# EAGLE board pi-shield (EAGLE 8.2.2)
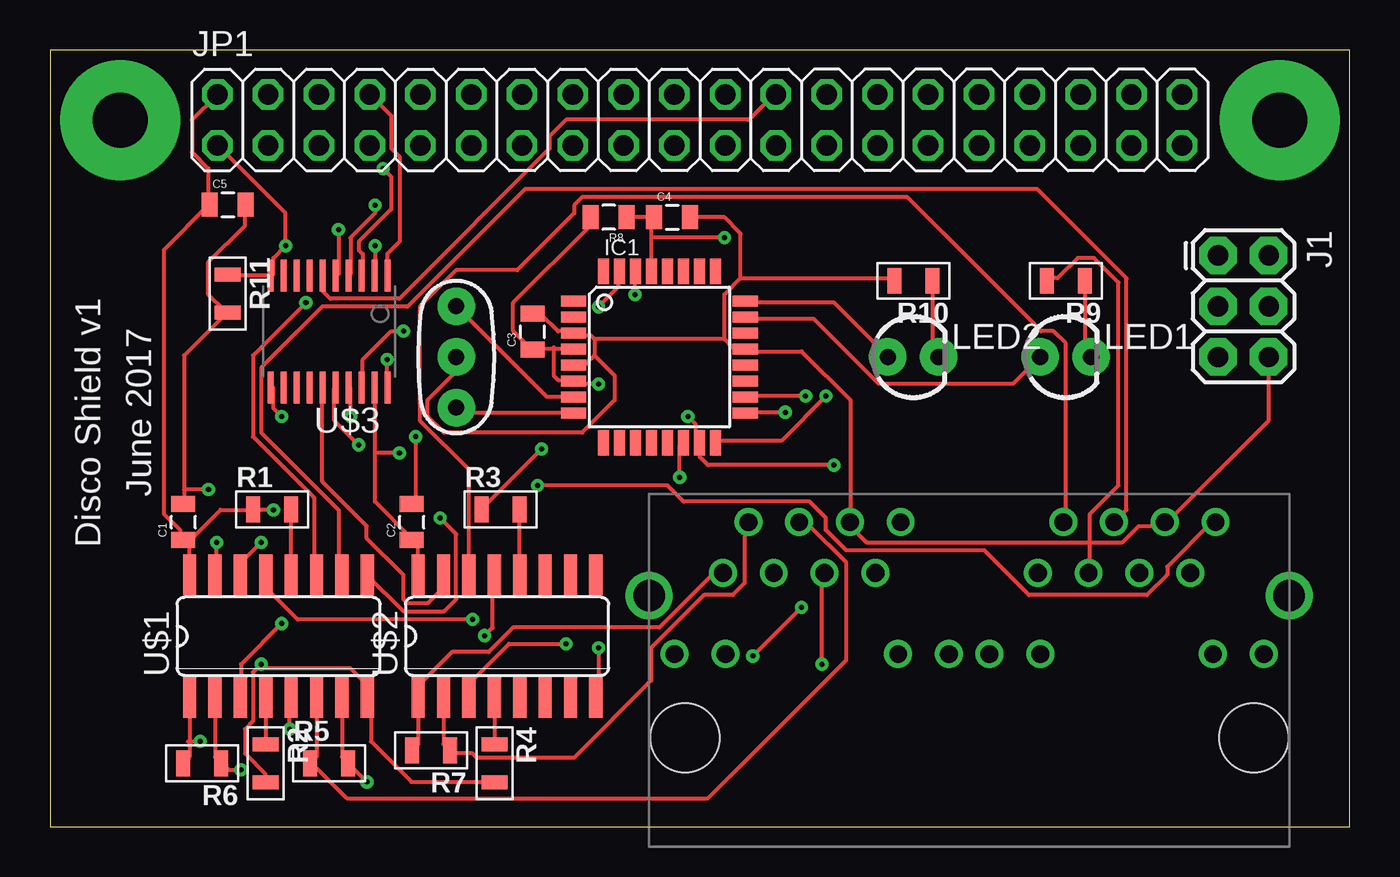
[diagram p0: board, top side]
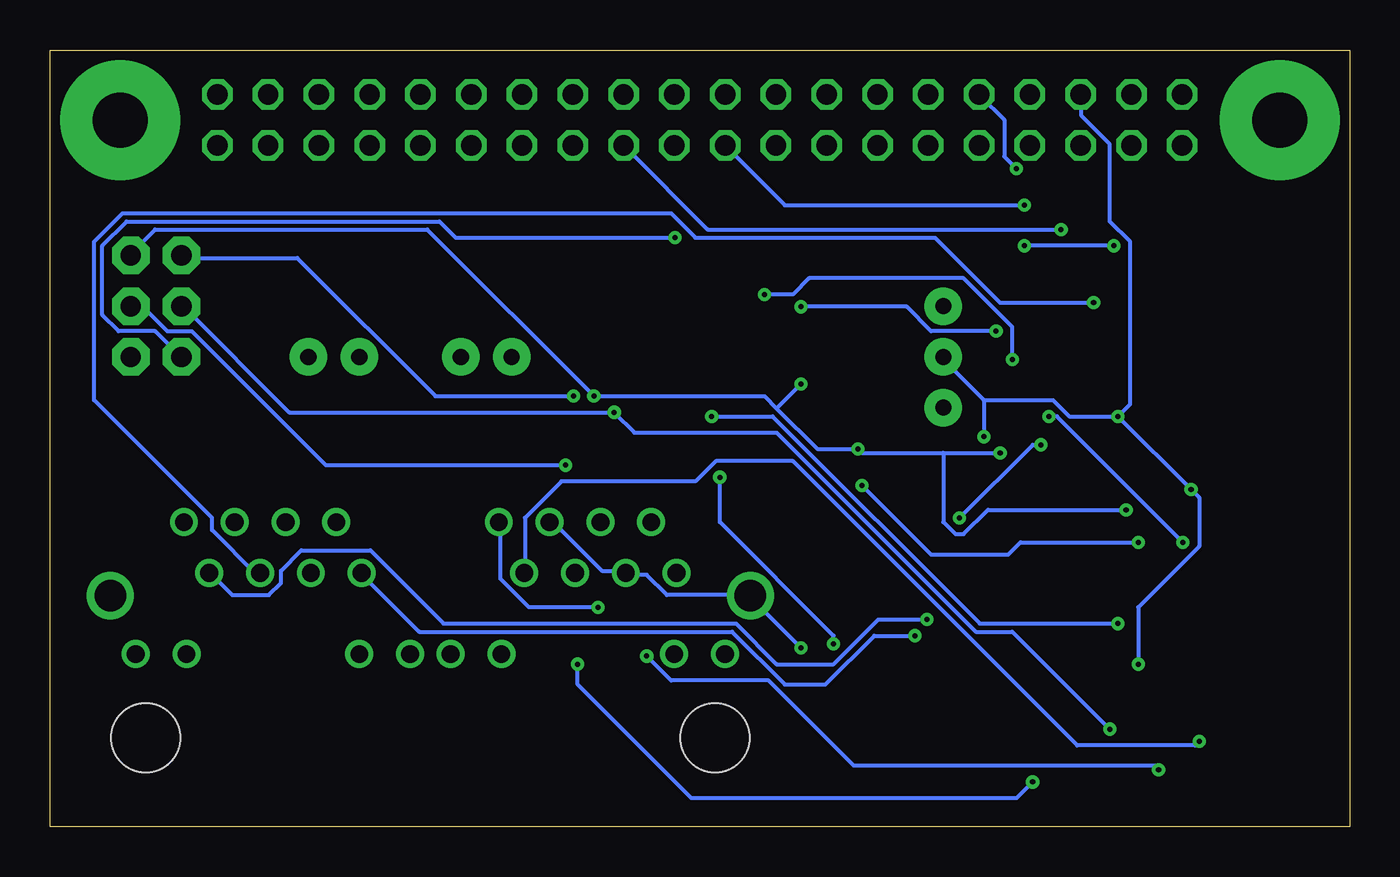
[diagram p1: board, bottom side, seen from below]

Size 65 x 38.85 mm. Coordinates in mm from the lower left corner, seen from the top.
Outline: 0,0 65,0 65,38.85 0,38.85 0,0
Copper layers (1*16): Top 0.035mm / dielectric 1.5mm / Bottom 0.035mm
Design rules "default *": minimum track width 8mil, minimum drill 10mil, track to track 8mil, track to pad 8mil, pad to pad 8mil, via to via 8mil, smd to smd 8mil, copper to edge 40mil, drill to drill 8mil, minimum pad ring 10mil, minimum via ring 8mil, stop-mask expansion 4mil, vias tented up to drill 0mil, thermal gap 10mil

## Footprints (pad centres in the part's own frame; a part is rotated, then mirrored left to right if it is on the bottom)
0805 = smd 0.8 x 1.2: 1 -0.9,0; 2 0.9,0
TQFP32-08 = smd 1.27 x 0.559: 1 -4.293,2.8; 2 -4.293,2; 3 -4.293,1.2; 4 -4.293,0.4; 5 -4.293,-0.4; 6 -4.293,-1.2; 7 -4.293,-2; 8 -4.293,-2.8; 17 4.293,-2.8; 18 4.293,-2; 19 4.293,-1.2; 20 4.293,-0.4; 21 4.293,0.4; 22 4.293,1.2; 23 4.293,2; 24 4.293,2.8 | smd 0.559 x 1.27: 9 -2.8,-4.293; 10 -2,-4.293; 11 -1.2,-4.293; 12 -0.4,-4.293; 13 0.4,-4.293; 14 1.2,-4.293; 15 2,-4.293; 16 2.8,-4.293; 25 2.8,4.293; 26 2,4.293; 27 1.2,4.293; 28 0.4,4.293; 29 -0.4,4.293; 30 -1.2,4.293; 31 -2,4.293; 32 -2.8,4.293
2X3 = drill 1.016 pad 1.88 octagon: 1 0,0; 2 0,2.54; 3 2.54,0; 4 2.54,2.54; 5 5.08,0; 6 5.08,2.54
2X20 = drill 1.016 octagon: 1 -24.13,-1.27; 2 -24.13,1.27; 3 -21.59,-1.27; 4 -21.59,1.27; 5 -19.05,-1.27; 6 -19.05,1.27; 7 -16.51,-1.27; 8 -16.51,1.27; 9 -13.97,-1.27; 10 -13.97,1.27; 11 -11.43,-1.27; 12 -11.43,1.27; 13 -8.89,-1.27; 14 -8.89,1.27; 15 -6.35,-1.27; 16 -6.35,1.27; 17 -3.81,-1.27; 18 -3.81,1.27; 19 -1.27,-1.27; 20 -1.27,1.27; 21 1.27,-1.27; 22 1.27,1.27; 23 3.81,-1.27; 24 3.81,1.27; 25 6.35,-1.27; 26 6.35,1.27; 27 8.89,-1.27; 28 8.89,1.27; 29 11.43,-1.27; 30 11.43,1.27; 31 13.97,-1.27; 32 13.97,1.27; 33 16.51,-1.27; 34 16.51,1.27; 35 19.05,-1.27; 36 19.05,1.27; 37 21.59,-1.27; 38 21.59,1.27; 39 24.13,-1.27; 40 24.13,1.27
LED3MM = drill 0.813 pad 1.88: A -1.27,0; K 1.27,0
R0805 = smd 0.7 x 1.3: P$1 -0.95,0; P$2 0.95,0
SOP-16 = smd 0.66 x 2.032: 1 -4.445,-3.073; 2 -3.175,-3.073; 3 -1.905,-3.073; 4 -0.635,-3.073; 5 0.635,-3.073; 6 1.905,-3.073; 7 3.175,-3.073; 8 4.445,-3.073; 9 4.445,3.073; 10 3.175,3.073; 11 1.905,3.073; 12 0.635,3.073; 13 -0.635,3.073; 14 -1.905,3.073; 15 -3.175,3.073; 16 -4.445,3.073
TSSOP20 = smd 0.3 x 1.6: P$1 -2.925,-2.8; P$2 -2.275,-2.8; P$3 -1.625,-2.8; P$4 -0.975,-2.8; P$5 -0.325,-2.8; P$6 0.325,-2.8; P$7 0.975,-2.8; P$8 1.625,-2.8; P$9 2.275,-2.8; P$10 2.925,-2.8; P$11 2.925,2.8; P$12 2.275,2.8; P$13 1.625,2.8; P$14 0.975,2.8; P$15 0.325,2.8; P$16 -0.325,2.8; P$17 -0.975,2.8; P$18 -1.625,2.8; P$19 -2.275,2.8; P$20 -2.925,2.8
RJSBE-5380-C2 = drill 0.89: 1@1 1.91,8.25; 1@2 17.66,8.25; 2@1 3.18,10.79; 2@2 18.93,10.79; 3@1 4.45,8.25; 3@2 20.2,8.25; 4@1 5.72,10.79; 4@2 21.47,10.79; 5@1 6.99,8.25; 5@2 22.74,8.25; 6@1 8.26,10.79; 6@2 24.01,10.79; 7@1 9.53,8.25; 7@2 25.28,8.25; 8@1 10.8,10.79; 8@2 26.55,10.79; 9@1 13.21,4.19; 9@2 28.96,4.19; 10@1 10.67,4.19; 10@2 26.42,4.19; 11@1 2.03,4.19; 11@2 17.78,4.19; 12@1 -0.51,4.19; 12@2 15.24,4.19 | drill 1.57: SHIELD@1 -1.78,7.11; SHIELD@2 30.23,7.11 | hole 3.45: 0,0; 28.45,0
RESONATOR-PTH = drill 0.8 pad 1.88: 1 -2.54,0; 2 0,0; 3 2.54,0

## Placement (x,y rotation side)
C1  .1u  [0805]  6.67,15.24 90 top
C2  .1u  [0805]  18.1,15.24 90 top
C3  .1u  [0805]  24.13,24.77 90 top
C4  .1u  [0805]  31.11,30.48 0 top
C5  10u  [0805]  8.89,31.11 0 top
IC1  MEGA48/88/168-AU  [TQFP32-08]  30.48,23.5 0 top
J1  AVR_SPI_PRG_6PTH  [2X3]  58.42,28.57 270 top
JP1  PI-HEADER  [2X20]  32.5,35.35 0 top
LED1  IND1  [LED3MM]  50.8,23.5 0 top
LED2  IND2  [LED3MM]  43.18,23.5 0 top
R1  1k  [R0805]  11.11,15.88 0 top
R2  1k  [R0805]  10.79,3.17 270 top
R3  1k  [R0805]  22.54,15.88 0 top
R4  1k  [R0805]  22.23,3.17 270 top
R5  100  [R0805]  13.97,3.17 0 top
R6  100  [R0805]  7.62,3.17 180 top
R7  100  [R0805]  19.05,3.81 180 top
R8  4K7  [0805]  27.94,30.48 180 top
R9  400  [R0805]  50.8,27.3 180 top
R10  400  [R0805]  43.18,27.3 180 top
R11  1k  [R0805]  8.89,26.67 270 top
U$1  SN65C1167  [SOP-16]  11.43,9.53 0 top
U$2  SN65C1167  [SOP-16]  22.86,9.53 0 top
U$3  TXB0108PWR  [TSSOP20]  13.97,24.77 180 top
U$4  RJSBE-5380-C2  [RJSBE-5380-C2]  31.75,4.45 0 top
Y1  RESONATORPTH  [RESONATOR-PTH]  20.32,23.5 270 top

## Library data of the parts
C1-C5 LED1 LED2 R8 Y1 = SparkFun
IC1 = avr-7
J1 = SparkFun-Connectors
JP1 = pinhead
R1-R7 R9-R11 = MF_Passives; POPULATE: 1
U$1-U$4 = GARTH

## Nets
!SS_AT: IC1.14 U$2.3
CE0_PI: JP1.24 U$3.P$6
CE0_PI_5V: U$2.15 U$3.P$15
CE1_PI: JP1.26
D4: U$2.9
D-B-1: U$1.10 U$4.4@2
D-B-2: U$1.11 U$4.5@2
D-BR-1: U$1.14 U$4.8@2
D-BR-2: U$1.13 U$4.7@2
D-O-1: U$2.14 U$4.2@2
D-O-2: U$2.13 U$4.1@2
GND: C1.2 C2.2 C3.2 C4.2 C5.2 IC1.3 IC1.5 IC1.21 J1.6 JP1.6 R2.P$2 R4.P$2 R9.P$2 R10.P$2 R11.P$2 U$1.8 U$2.8 U$3.P$11 U$4.3@1 U$4.3@2 U$4.6@1 U$4.6@2 U$4.SHIELD@1 Y1.2
LED1: IC1.23 LED1.A
LED2: IC1.24 LED2.A
MISO_AT: IC1.16 J1.1
MISO_PI: JP1.21
MOSI_AT: IC1.15 J1.4 U$1.3
MOSI_PI: JP1.19 U$3.P$4
MOSI_PI_5V: U$1.15 U$3.P$17
N$1: R1.P$2 U$1.12
N$3: R2.P$1 U$1.4
N$5: R3.P$2 U$2.12
N$6: R4.P$1 U$2.4
N$9: LED1.K R9.P$1
N$10: LED2.K R10.P$1
N$11: IC1.7 Y1.1
N$12: IC1.8 Y1.3
R4: U$2.5
R-B-1: R5.P$1 U$1.6 U$4.4@1
R-B-2: R5.P$2 U$1.7 U$4.5@1
R-BR-1: R6.P$1 U$1.2 U$4.8@1
R-BR-2: R6.P$2 U$1.1 U$4.7@1
R-O-1: R7.P$1 U$2.2 U$4.2@1
R-O-2: R7.P$2 U$2.1 U$4.1@1
RESET: C4.1 IC1.29 J1.5 R8.1
RXD_PI: JP1.10 U$3.P$3
RXD_PI_5V: IC1.31 U$3.P$18
SCK_AT: IC1.17 J1.3 U$1.5
SCLK_PI: JP1.23 U$3.P$5
SCLK_PI_5V: U$1.9 U$3.P$16
TXD_PI: JP1.8 U$3.P$1
TXD_PI_5V: IC1.30 U$3.P$20
V3.3: JP1.1 R11.P$1 U$3.P$2 U$3.P$10
VCC: C1.1 C2.1 C3.1 C5.1 IC1.4 IC1.6 IC1.18 J1.2 JP1.2 R1.P$1 R3.P$1 R8.2 U$1.16 U$2.16 U$3.P$19
XCK_AT: IC1.2

## Tracks (layer width: path | path; a pad name or v marks a point on that pad's centre or on a via)
!SS_AT  (via drill 0.25)
  Top 0.203: v31.5,17.48 31.5,19.1 IC1.14 | v25.81,9.14 22.96,9.14 21.13,7.32 21.13,6.5 U$2.3
  Bottom 0.203: v31.5,17.48 31.5,15.24 25.81,9.55 v25.81,9.14
CE0_PI
  Top 0.203: U$3.P$6 13.61,27.43 13.61,26.82 14.02,26.42 17.48,26.42 24.99,33.93 24.99,34.54 25.81,35.36 34.95,35.36 36.17,36.58 JP1.24
CE0_PI_5V
  Top 0.203: U$3.P$15 13.61,21.95 13.61,17.27 15.85,15.04 15.85,14.43 17.68,12.6 17.68,11.38 17.88,11.18 18.9,11.18 19.51,11.79 19.51,12.6 U$2.15
D-B-1
  Top 0.203: U$1.10 14.43,12.6 14.43,15.85 10.57,19.71 10.57,22.96 13.61,26.01 17.88,26.01 23.77,31.9 49.38,31.9 53.85,27.43 53.85,15.85 53.24,15.24 U$4.4@2
D-B-2  (via drill 0.25)
  Top 0.203: v12.8,26.21 10.16,23.57 10.16,19.51 13.21,16.46 13.21,12.6 U$1.11
  Bottom 0.203: v12.8,26.21 17.48,26.21 20.73,29.46 32.72,29.46 33.93,30.68 61.37,30.68 62.79,29.26 62.79,21.34 56.9,15.44 56.9,14.83 54.66,12.6 U$4.5@2
D-BR-1  (via drill 0.25)
  Top 0.203: v10.57,14.22 9.55,13.21 9.55,12.6 U$1.14 | v24.38,17.07 30.89,17.07 31.7,16.26 38,16.26 38.81,15.44 38.81,14.83 39.83,13.82 46.74,13.82 48.97,11.58 54.86,11.58 55.88,12.6 55.88,13.01 58.12,15.24 U$4.8@2
  Bottom 0.203: v10.57,14.22 16.46,14.22 17.07,13.61 20.93,13.61 v24.38,17.07
D-BR-2  (via drill 0.25)
  Top 0.203: v21.13,10.36 12.39,10.36 10.97,11.79 10.97,12.6 U$1.13
  Bottom 0.203: v21.13,10.36 23.57,10.36 25.81,8.13 28.65,8.13 30.68,10.16 45.31,10.16 48.97,13.82 52.43,13.82 53.44,12.8 53.44,12.19 54.05,11.58 55.88,11.58 56.9,12.6 U$4.7@2
D-O-1
  Top 0.203: U$2.14 20.93,12.6 20.93,17.88 18.49,20.32 18.49,26.01 20.32,27.84 23.37,27.84 26.21,30.68 26.21,31.09 26.62,31.5 42.88,31.5 49.58,24.79 50.19,24.79 50.8,24.18 50.8,15.24 U$4.2@2
D-O-2  (via drill 0.25)
  Top 0.203: v21.74,9.55 22.15,9.96 22.15,12.6 U$2.13
  Bottom 0.203: v21.74,9.55 23.77,9.55 26.21,7.11 28.25,7.11 30.89,9.75 46.53,9.75 49.38,12.6 U$4.1@2
GND  (via drill 0.25)
  Top 0.203: 6.71,16.87 6.71,23.57 8.74,25.6 R11.P$2 8.74,25.81 7.92,26.62 7.92,28.25 9.75,30.07 9.75,31.09 C5.2 | 6.71,16.87 6.71,16.26 C1.2 | 10.57,7.92 15.04,7.92 15.85,7.11 15.85,6.5 U$1.8 16.05,6.3 16.05,4.27 18.09,2.23 22.15,2.23 R4.P$2 | 10.57,7.92 10.36,7.92 10.16,7.72 10.16,5.28 9.75,4.88 9.75,3.66 10.77,2.64 10.77,2.23 R2.P$2 | v18.29,19.51 18.29,16.26 C2.2 | v11.58,20.52 11.18,20.93 11.18,21.95 U$3.P$11 | v10.57,8.13 10.57,7.92 | v7.92,16.87 6.71,16.87 | 52.02,14.22 52.02,12.8 U$4.3@2 | 52.02,14.22 52.02,15.65 53.44,17.07 53.44,27.23 52.22,28.45 51.41,28.45 50.39,27.43 49.99,27.43 R9.P$2 | 52.02,14.22 53.65,14.22 54.46,15.04 55.68,15.04 U$4.6@2 55.88,15.24 60.96,20.32 J1.6 | v27.43,8.94 27.43,6.5 U$2.8 | C3.2 24.18,25.6 24.59,25.6 25.4,24.79 26.01,24.79 IC1.3 26.21,24.59 27.03,24.59 27.23,24.38 | 27.23,23.57 26.82,23.16 26.21,23.16 IC1.5 | 27.23,24.38 27.23,23.57 | C4.2 33.73,30.48 34.54,29.67 34.54,27.43 | 34.54,27.43 33.73,26.62 33.73,24.38 | 33.73,24.38 34.14,23.98 34.75,23.98 IC1.21 34.95,23.77 37.59,23.77 40.03,21.34 40.03,15.24 U$4.6@1 40.03,15.04 40.84,14.22 52.02,14.22 | 34.54,27.43 42.06,27.43 R10.P$2 | 33.73,24.38 27.23,24.38 | Y1.2 20.32,22.76 18.9,21.34 18.9,20.52 19.71,19.71 26.62,19.71 28.25,21.34 28.25,22.55 27.23,23.57
  Bottom 0.203: 18.29,21.34 v18.29,19.51 | 18.29,21.34 20.32,23.37 Y1.2 | v11.58,20.52 14.02,20.52 14.83,21.34 18.29,21.34 | v11.58,20.52 10.97,21.13 10.97,29.26 11.99,30.28 11.99,34.14 13.41,35.56 13.41,36.58 JP1.6 | v10.57,8.13 10.57,10.97 7.52,14.02 7.52,16.46 v7.92,16.87 v11.58,20.52 | U$4.6@1 39.83,15.24 37.39,12.8 36.37,12.8 U$4.3@1 36.17,12.6 35.15,12.6 34.14,11.58 30.07,11.58 U$4.SHIELD@1 29.87,11.38 v27.43,8.94
LED1
  Top 0.203: IC1.23 34.95,25.4 38.2,25.4 41.45,22.15 48.16,22.15 49.38,23.37 LED1.A
LED2
  Top 0.203: IC1.24 34.95,26.21 39.22,26.21 41.86,23.57 LED2.A
MISO_AT  (via drill 0.25)
  Top 0.203: v38.81,21.54 36.58,19.3 33.33,19.3 IC1.16
  Bottom 0.203: v38.81,21.54 45.72,21.54 52.63,28.45 58.32,28.45 J1.1
MOSI_AT  (via drill 0.25)
  Top 0.203: v39.22,18.09 32.92,18.09 32.51,18.49 32.51,19.1 IC1.15 32.31,19.3 32.31,20.12 v31.9,20.52 | v11.58,10.16 9.55,8.13 9.55,6.5 U$1.3
  Bottom 0.203: v39.22,18.09 51.21,18.09 57.91,24.79 59.13,24.79 60.35,26.01 60.96,26.01 J1.4 | v11.58,10.16 18.49,10.16 28.85,20.52 v31.9,20.52
MOSI_PI  (via drill 0.25)
  Top 0.203: v16.26,31.09 16.26,30.68 15.04,29.46 15.04,27.64 U$3.P$4
  Bottom 0.203: v16.26,31.09 28.25,31.09 31.09,33.93 JP1.19
MOSI_PI_5V  (via drill 0.25)
  Top 0.203: v15.04,20.52 15.04,21.95 U$3.P$17 | v8.33,14.22 8.33,12.6 U$1.15
  Bottom 0.203: v15.04,20.52 14.63,20.52 v8.33,14.22
N$1
  Top 0.203: U$1.12 R1.P$2
N$3
  Top 0.203: U$1.4 R2.P$1
N$5
  Top 0.203: U$2.12 R3.P$2
N$6
  Top 0.203: U$2.4 R4.P$1
N$7  (via drill 2.75 pad 6)
  other vias: 61.5,35.35
N$8  (via drill 2.75 pad 6)
  other vias: 3.5,35.35
N$9
  Top 0.203: R9.P$1 51.75,23.82 LED1.K
N$10
  Top 0.203: R10.P$1 44.13,23.82 LED2.K
N$11
  Top 0.203: IC1.7 24.86,21.5 Y1.1
N$12
  Top 0.203: IC1.8 20.58,20.7 Y1.3
R-B-1
  Top 0.203: U$1.6 13.34,3.49 R5.P$1 13.21,3.05 14.83,1.42 32.92,1.42 39.83,8.33 39.83,13.21 38,15.04 37.59,15.04 U$4.4@1
R-B-2  (via drill 0.25)
  Top 0.203: U$1.7 14.61,3.49 R5.P$2 15.04,3.05 v15.85,2.23 | v38.61,8.13 38.61,12.6 U$4.5@1
  Bottom 0.203: v38.61,8.13 38.61,7.11 32.92,1.42 16.66,1.42 v15.85,2.23
R-BR-1  (via drill 0.25)
  Top 0.203: U$1.2 8.26,3.49 R6.P$1 8.74,3.05 8.94,2.85 v9.55,2.85 | v35.15,8.53 v37.59,10.97
  Bottom 0.203: v37.59,10.97 41.05,10.97 42.47,12.39 42.47,15.04 U$4.8@1 | v35.15,8.53 33.93,7.32 29.06,7.32 24.79,3.05 9.75,3.05 v9.55,2.85
R-BR-2  (via drill 0.25)
  Top 0.203: U$1.1 6.99,4.27 | 6.99,4.27 6.99,3.49 R6.P$2 | 6.99,4.27 v7.52,4.27 | 6.91,4.27 6.99,4.27
  Bottom 0.203: v7.52,4.27 7.72,4.06 13.61,4.06 27.84,18.29 31.7,18.29 32.72,17.27 39.42,17.27 41.25,15.44 41.25,12.8 U$4.7@1
R-O-1
  Top 0.203: U$2.2 19.68,4.12 R7.P$1 20.12,3.66 21.13,3.66 21.34,3.45 26.21,3.45 30.07,7.32 30.07,8.94 32.72,11.58 34.14,11.58 34.75,12.19 34.75,15.04 U$4.2@1
R-O-2
  Top 0.203: R7.P$2 18.41,4.12 U$2.1 18.49,6.5 18.49,7.11 20.12,8.74 21.95,8.74 23.16,9.96 30.48,9.96 33.12,12.6 33.53,12.6 U$4.1@1
RESET  (via drill 0.25)
  Top 0.203: IC1.29 30.08,29.46 | 30.08,29.46 30.08,30.34 C4.1 R8.1 | v33.73,29.46 30.08,29.46 | 30.07,29.46 30.08,29.46
  Bottom 0.203: v33.73,29.46 44.7,29.46 45.52,30.28 61.16,30.28 62.38,29.06 62.38,25.6 61.57,24.79 59.74,24.79 58.52,23.57 J1.5
RXD_PI  (via drill 0.25)
  Top 0.203: v16.66,32.92 17.07,32.51 17.07,30.89 15.44,29.26 15.44,28.85 15.65,28.65 15.65,27.64 U$3.P$3
  Bottom 0.203: v16.66,32.92 17.27,33.53 17.27,35.36 18.49,36.58 JP1.10
RXD_PI_5V  (via drill 0.25)
  Top 0.203: v27.43,26.01 28.45,27.03 28.45,27.64 IC1.31 | v17.68,24.79 17.07,24.79 15.65,23.37 15.65,22.15 U$3.P$18
  Bottom 0.203: v27.43,26.01 22.15,26.01 20.93,24.79 v17.68,24.79
SCK_AT  (via drill 0.25)
  Top 0.203: v36.78,20.73 34.95,20.73 IC1.17 | v11.99,4.88 11.99,6.3 U$1.5
  Bottom 0.203: J1.3 58.32,26.01 53.03,20.73 v36.78,20.73 35.76,19.71 28.65,19.71 18.69,9.75 16.87,9.75 v11.99,4.88
SCLK_PI  (via drill 0.25)
  Top 0.203: v14.43,29.87 14.43,27.64 U$3.P$5
  Bottom 0.203: v14.43,29.87 32.11,29.87 36.17,33.93 JP1.23
SCLK_PI_5V  (via drill 0.25)
  Top 0.203: v15.44,19.1 14.22,20.32 14.22,21.95 U$3.P$16 | v19.51,15.44 20.32,14.63 20.32,11.38 19.71,10.77 17.68,10.77 15.85,12.6 U$1.9
  Bottom 0.203: v15.44,19.1 15.85,19.1 v19.51,15.44
TXD_PI
  Top 0.203: U$3.P$1 16.87,27.64 16.87,28.65 17.48,29.26 17.48,33.53 17.07,33.93 17.07,35.56 16.05,36.58 JP1.8
TXD_PI_5V  (via drill 0.25)
  Top 0.203: v29.26,26.62 29.26,27.64 IC1.30 | v16.87,23.37 16.87,22.15 U$3.P$20
  Bottom 0.203: v29.26,26.62 27.84,26.62 27.03,27.43 19.3,27.43 16.87,24.99 v16.87,23.37
V3.3  (via drill 0.25)
  Top 0.203: R11.P$1 8.95,27.57 U$3.P$10 11.18,27.64 11.18,28.45 v11.79,29.06 11.79,30.68 8.53,33.93 JP1.1 | v16.26,29.06 16.26,27.64 U$3.P$2
  Bottom 0.203: v11.79,29.06 v16.26,29.06
VCC  (via drill 0.25)
  Top 0.203: 18.25,12.6 U$2.16 18.41,14.02 C2.1 18.09,14.43 16.26,16.26 16.26,18.69 | 6.82,12.6 U$1.16 6.99,14.02 C1.1 | IC1.4 25.2,23.89 | 25.2,23.89 24.16,23.89 C3.1 23.98,23.98 23.16,24.79 23.16,26.21 27.03,30.07 27.03,30.48 R8.2 | C1.1 6.91,14.22 8.53,15.85 10.16,15.85 R1.P$1 10.36,15.85 v11.18,15.85 | JP1.2 8.33,36.58 7.11,35.36 7.11,33.73 7.92,32.92 7.92,31.29 C5.1 7.92,31.09 5.69,28.85 5.69,15.65 6.5,14.83 6.5,14.43 C1.1 | 25.2,23.89 25.2,22.55 25.4,22.35 26.01,22.35 IC1.6 26.21,22.15 v27.43,22.15 | 25.2,23.98 25.2,23.89 | 16.26,18.69 16.26,21.95 U$3.P$19 | v37.8,21.54 34.95,21.54 IC1.18 | v24.59,18.9 21.74,16.05 R3.P$1 | v17.48,18.69 16.26,18.69
  Bottom 0.203: J1.2 60.96,28.65 59.74,29.87 46.13,29.87 v37.8,21.54 29.26,21.54 28.65,20.93 | 28.65,20.93 26.62,18.9 v24.59,18.9 24.38,18.69 20.32,18.69 | 20.32,18.69 v17.48,18.69 | 28.65,20.93 v27.43,22.15 | v11.18,15.85 18.09,15.85 19.3,14.63 19.71,14.63 20.32,15.24 20.32,18.69

## Text on the board
tPlace: June 2017 | Disco Shield v1